# EAGLE board driver_MC33887PFK (EAGLE 7.6.0)

Size 25.5 x 16 mm. Coordinates in mm from the lower left corner, seen from the top.
Outline: 23,16 23,13.5 25.5,13.5 25.5,2.5 23,2.5 23,0 0,0 arc139 0,16 23,16
Copper layers (1*16): Top 0.035mm / dielectric 1.5mm / Bottom 0.035mm
Design rules "default": minimum track width 10mil, minimum drill 24mil, track to track 8mil, track to pad 8mil, pad to pad 8mil, via to via 8mil, smd to smd 8mil, copper to edge 40mil, drill to drill 8mil, minimum pad ring 10mil, minimum via ring 8mil, stop-mask expansion 4mil, vias tented up to drill 0mil, thermal gap 10mil

## Footprints (pad centres in the part's own frame; a part is rotated, then mirrored left to right if it is on the bottom)
PANASONIC_D = smd 3 x 1.4: + 2.4,0; - -2.4,0
C0402K = smd 0.925 x 0.74: 1 -0.6,0; 2 0.6,0
C0603K = smd 1.05 x 1.08: 1 -0.875,0; 2 0.875,0
TO-92 = drill 0.813 pad 1.27 octagon: 1 -1.27,0; 2 0,1.905; 3 1.27,0
R0402 = smd 0.7 x 0.9: 1 -0.65,0; 2 0.65,0
R0603 = smd 1 x 1.1: 1 -0.85,0; 2 0.85,0
1X8 = drill 0.635 pad 1.016: 1 0,0; 2 1.27,0; 3 2.54,0; 4 3.81,0; 5 5.08,0; 6 6.35,0; 7 7.62,0; 8 8.89,0
1X8_MALE = drill 0.635 pad 1.016: 1 0,0; 2 1.27,0; 3 2.54,0; 4 3.81,0; 5 5.08,0; 6 6.35,0; 7 7.62,0; 8 8.89,0
QFN32 = smd 0.8 x 0.8: 1 -4,4; 10 -4,-4; 19 4,-4; 28 4,4 | smd 1.2 x 0.6: 2 -4.2,2.8; 3 -4.2,2; 4 -4.2,1.2; 5 -4.2,0.4; 6 -4.2,-0.4; 7 -4.2,-1.2; 8 -4.2,-2; 9 -4.2,-2.8; 20 4.2,-2.8; 21 4.2,-2; 22 4.2,-1.2; 23 4.2,-0.4; 24 4.2,0.4; 25 4.2,1.2; 26 4.2,2; 27 4.2,2.8 | smd 0.6 x 1.2: 11 -2.8,-4.2; 12 -2,-4.2; 13 -1.2,-4.2; 14 -0.4,-4.2; 15 0.4,-4.2; 16 1.2,-4.2; 17 2,-4.2; 18 2.8,-4.2; 29 2.8,4.2; 30 2,4.2; 31 1.2,4.2; 32 0.4,4.2; 33 -0.4,4.2; 34 -1.2,4.2; 35 -2,4.2; 36 -2.8,4.2 | smd 6.2 x 6.2: EXP 0,0
SOT23-8L = smd 0.45 x 1: 1 -0.975,-1.225; 2 -0.325,-1.225; 3 0.325,-1.225; 4 0.975,-1.225; 5 0.975,1.225; 6 0.325,1.225; 7 -0.325,1.225; 8 -0.975,1.225

## Placement (x,y rotation side)
C1  100u  [PANASONIC_D]  19.5,9.5 90 bottom
C2  100n  [C0402K]  32.25,3 90 top  (outside the outline)
C3  10u  [C0603K]  31,3 90 top  (outside the outline)
C4  33n  [C0402K]  10.75,13.75 90 top
C5  1u  [C0402K]  29.75,3 90 top  (outside the outline)
C6  1u  [C0402K]  20,4 90 top
C8  100n  [C0402K]  31,10.25 180 top  (outside the outline)
IC1  DS1820  [TO-92]  5.5,13 60 bottom
R3  100  [R0402]  21.5,4 270 top
R4  0.1  [R0603]  31,5.75 0 top  (outside the outline)
U$1  1X8_female  [1X8]  24,12.5 270 bottom
U$2  1X8_female  [1X8]  13,14.5 180 bottom
U$3  1X8_male  [1X8_MALE]  13,1.5 0 top
U$4  MC33887PFK  [QFN32]  13.25,7.5 0 top
U$5  INA219AIDCNR  [SOT23-8L]  31,8.25 90 top  (outside the outline)

## Library data of the parts
C1-C6 C8 R3 R4 = rcl
IC1 = DS1820
U$1-U$3 = headers(.05in)
U$4 = MC33887PFK
U$5 = INA219AIDCNR

## Nets
5V: C2.1 C3.1 C8.1 IC1.3 U$3.4 U$5.4
!D2: U$4.27
!FS: U$4.9
D1: U$4.2
DATA: U$3.5
DS18B20: IC1.2
EN: U$4.4
FB: C6.1 R3.2 U$4.20
GND: C1.- C2.2 C3.2 C4.2 C5.2 C6.2 C8.2 IC1.1 R3.1 U$3.1 U$3.2 U$3.3 U$4.8 U$4.21 U$4.22 U$4.23 U$4.24 U$4.25 U$4.26 U$5.3 U$5.7 U$5.8
IN1: U$4.11
IN2: U$4.3
N$1: C4.1 U$4.36
OUT1: U$4.14 U$4.15 U$4.17 U$4.18
OUT2: U$4.29 U$4.30 U$4.32 U$4.33
SCL: U$5.5
SDA: U$5.6
VDD: C1.+ C5.1 R4.1 U$4.5 U$4.6 U$4.12 U$4.13 U$4.34 U$4.35 U$5.2
VIN: R4.2 U$3.6 U$3.7 U$3.8 U$5.1

## Tracks (layer width: path | path; a pad name or v marks a point on that pad's centre or on a via)
5V  (5 unrouted)
FB  (2 unrouted)
GND  (21 unrouted)
N$1  (1 unrouted)
OUT1  (3 unrouted)
OUT2  (3 unrouted)
VDD  (9 unrouted)
VIN  (4 unrouted)